# Altium PCB Esark Sign PCB.PcbDoc
Units mil, origin at the board's own origin, x right, y up, seen from the top; angles counter-clockwise.
Board outline 6000 x 4000 mil, 2 copper layers (Top Layer, Bottom Layer); 149 components, 5 nets, 300 pads, 0 vias.
Unrouted connection lines stored in the file: 127.
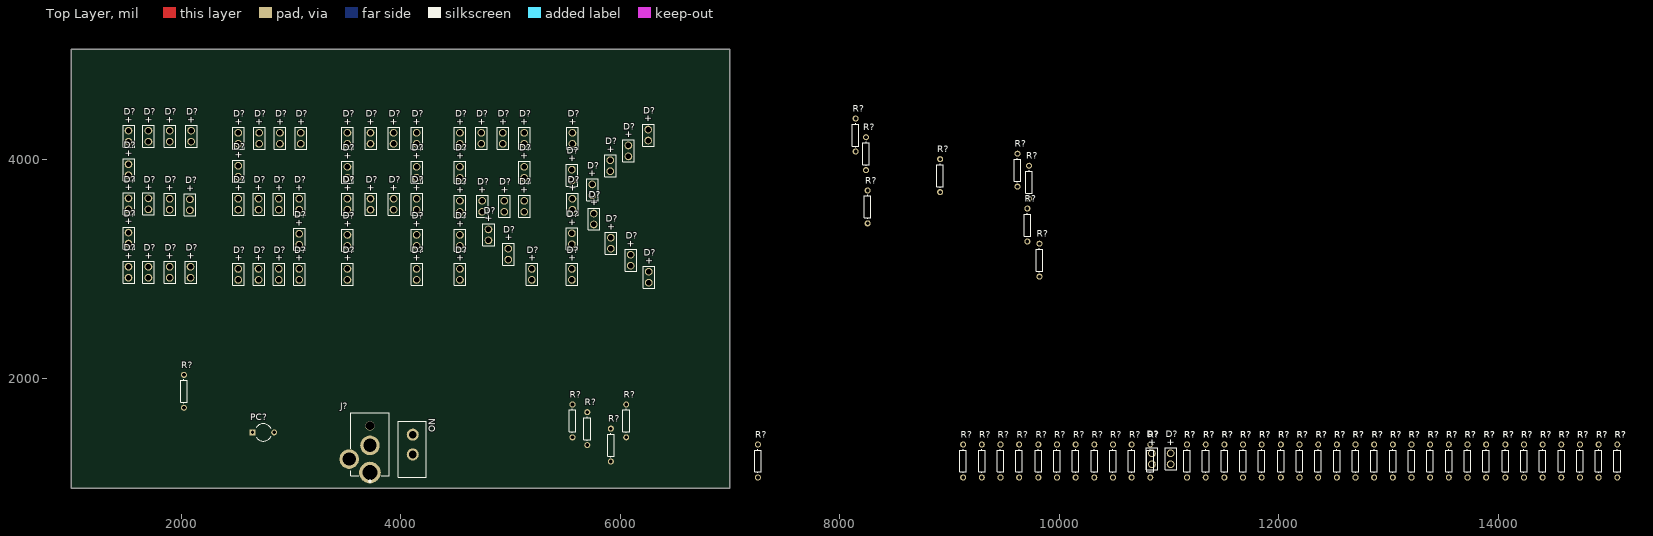
[diagram p0: Top Layer view]
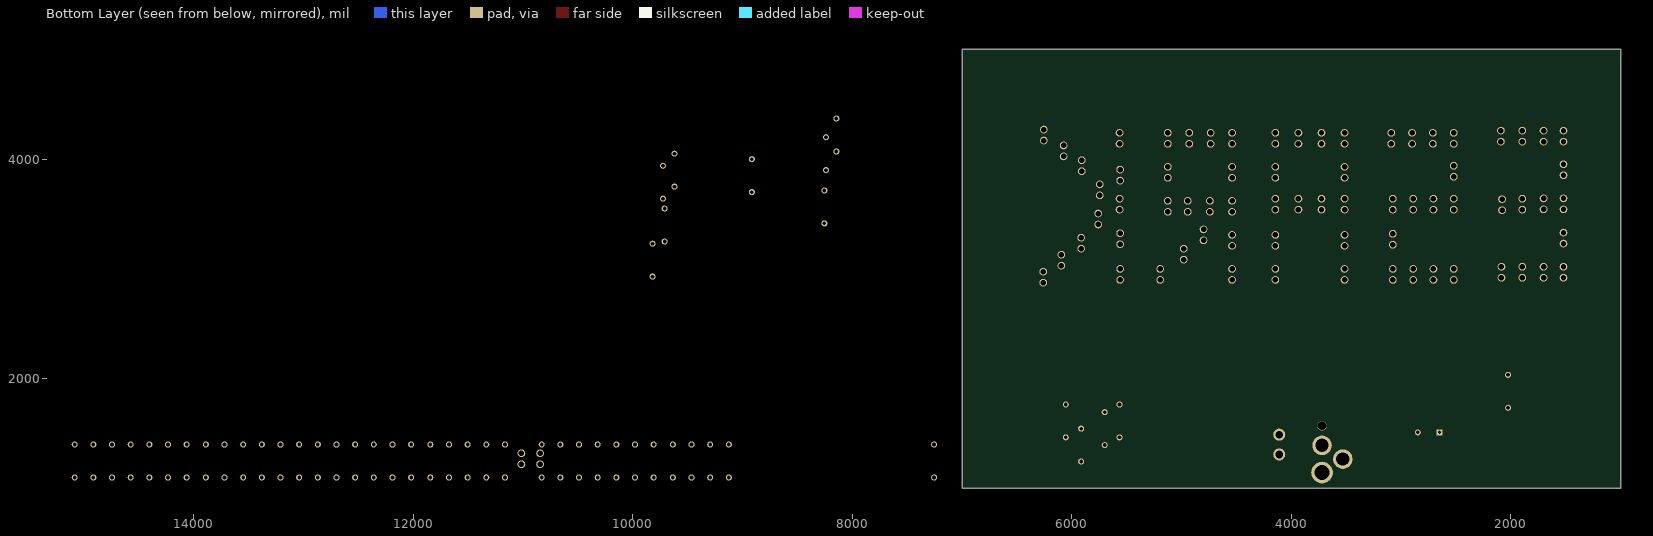
[diagram p1: Bottom Layer view, seen from below]

## Layer stack, top to bottom
Top Solder: solder mask 0.4, Solder Resist, Dk 3.5
Top Layer: signal copper 1.4
Dielectric 1: dielectric 12.6, FR-4, Dk 4.8
Bottom Layer: signal copper 1.4
Bottom Solder: solder mask 0.4, Solder Resist, Dk 3.5

## Board outline
1000,1000 7000,1000 7000,5000 1000,5000

## Design rules (kind name [scope] priority, off if disabled: settings)
Clearance [All] p1: gap=10 ignorepadtopadclearanceinfootprint=FALSE except(0: Arc-Hole Track-Hole SMDPad-Hole THPad-Hole Via-Hole Fill-Hole Poly-Hole Region-Hole Text-Hole)
PolygonConnect [All] p1: connectstyle=Relief reliefconductorwidth=10 reliefentries=4 polygonreliefangle="90 Angle" airgapwidth=10
RoomDefinition "Esark Sign Schematic" [InComponentClass('Esark Sign Schematic')] p1: confinementstyle=ConfineIn formatcopy=TRUE lockcomponents=FALSE outline 7045,1055 11915,1055 11915,1820 7045,1820
RoutingVias [All] p1: holewidth=28 width=50 viastyle="Through Hole" minholewidth=28 minwidth=50 maxholewidth=28 maxwidth=50
SolderMaskExpansion [All] p1: expansion=4 istentingtop=FALSE
Width [All] p1: maxlimit=10 minlimit=10 preferedwidth=10
30 further rules are at their usual default settings.

## Classes and differential pairs
component class "Esark Sign Schematic": D? J? PC? R?

## Components (designator, comment, footprint, x,y, rotation, side; value= is the part's Value field where it differs from the comment)
D? "LED0" LED-0 6255,4220 r90 top
D? "LED0" LED-0 6095,3080 r90 top
D? "LED0" LED-0 4741.67,3570 r90 top
D? "LED0" LED-0 5125,3570 r90 top
D? "LED0" LED-0 5560,3855 r90 top
D? "LED0" LED-0 4800,3310 r90 top
D? "LED0" LED-0 11015,1270 r90 top
D? "LED0" LED-0 4930,4190 r90 top
D? "LED0" LED-0 6075,4075 r90 top
D? "LED0" LED-0 5565,3590 r90 top
D? "LED0" LED-0 5910,3940 r90 top
D? "LED0" LED-0 4735,4190 r90 top
D? "LED0" LED-0 5565,4190 r90 top
D? "LED0" LED-0 5560,3275 r90 top
D? "LED0" LED-0 5125,4190 r90 top
D? "LED0" LED-0 5915,3235 r90 top
D? "LED0" LED-0 4980,3135 r90 top
D? "LED0" LED-0 5125,3880 r90 top
D? "LED0" LED-0 5560,2950 r90 top
D? "LED0" LED-0 4943.33,3570 r90 top
D? "LED0" LED-0 4540,2950 r90 top
D? "LED0" LED-0 5760,3455 r90 top
D? "LED0" LED-0 5195,2950 r90 top
D? "LED0" LED-0 5745,3720 r90 top
D? "LED0" LED-0 10845,1270 r90 top
D? "LED0" LED-0 3075,3590 r90 top
D? "LED0" LED-0 2520,2950 r90 top
D? "LED0" LED-0 4540,3260 r90 top
D? "LED0" LED-0 4145,2950 r90 top
D? "LED0" LED-0 4540,3570 r90 top
D? "LED0" LED-0 4145,3260 r90 top
D? "LED0" LED-0 3725,4190 r90 top
D? "LED0" LED-0 4145,3590 r90 top
D? "LED0" LED-0 3515,4190 r90 top
D? "LED0" LED-0 3515,3590 r90 top
D? "LED0" LED-0 2705,2950 r90 top
D? "LED0" LED-0 3075,2950 r90 top
D? "LED0" LED-0 3515,3260 r90 top
D? "LED0" LED-0 2890,2950 r90 top
D? "LED0" LED-0 3935,4190 r90 top
D? "LED0" LED-0 4540,3880 r90 top
D? "LED0" LED-0 4540,4190 r90 top
D? "LED0" LED-0 3515,2950 r90 top
D? "LED0" LED-0 4145,4190 r90 top
D? "LED0" LED-0 4145,3880 r90 top
D? "LED0" LED-0 3725,3590 r90 top
D? "LED0" LED-0 3515,3590 r90 top
D? "LED0" LED-0 3935,3590 r90 top
D? "LED0" LED-0 3075,3270 r90 top
D? "LED0" LED-0 2520,4190 r90 top
D? "LED0" LED-0 2900,4190 r90 top
D? "LED0" LED-0 6260,2925 r90 top
D? "LED0" LED-0 2520,3590 r90 top
D? "LED0" LED-0 2090,4210 r90 top
D? "LED0" LED-0 2710,4190 r90 top
D? "LED0" LED-0 2705,3590 r90 top
D? "LED0" LED-0 1701.67,4210 r90 top
D? "LED0" LED-0 2890,3590 r90 top
D? "LED0" LED-0 2520,3890 r90 top
D? "LED0" LED-0 1895,4210 r90 top
D? "LED0" LED-0 3090,4190 r90 top
D? "LED0" LED-0 2080,3585 r90 top
D? "LED0" LED-0 1520,4210 r90 top
D? "LED0" LED-0 1701.67,3592.5 r90 top
D? "LED0" LED-0 1895,3590 r90 top
D? "LED0" LED-0 1701.67,2970 r90 top
D? "LED0" LED-0 1520,3592.5 r90 top
D? "LED0" LED-0 1520,3903.75 r90 top
D? "LED0" LED-0 1520,3281.25 r90 top
D? "LED0" LED-0 2085,2970 r90 top
D? "LED0" LED-0 3515,3880 r90 top
D? "LED0" LED-0 1895,2970 r90 top
D? "LED0" LED-0 1520,2970 r90 top
J? "PJ-057BH" CUI_PJ-057BH 3720,1144.8 r90 top
PC? "33u" CAPR5-4X5 2748.43,1510 r0 top
R? "Res1" AXIAL-0.3 7255,1250 r90 top value=200
R? "Res1" AXIAL-0.3 12530,1250 r90 top value=200
R? "Res1" AXIAL-0.3 14915,1250 r90 top value=200
R? "Res1" AXIAL-0.3 14745,1250 r90 top value=200
R? "Res1" AXIAL-0.3 12700,1250 r90 top value=200
R? "Res1" AXIAL-0.3 11335,1250 r90 top value=200
R? "Res1" AXIAL-0.3 13890,1250 r90 top value=200
R? "Res1" AXIAL-0.3 11505,1250 r90 top value=200
R? "Res1" AXIAL-0.3 11845,1250 r90 top value=200
R? "Res1" AXIAL-0.3 13210,1250 r90 top value=200
R? "Res1" AXIAL-0.3 15085,1250 r90 top value=200
R? "Res1" AXIAL-0.3 14235,1250 r90 top value=200
R? "Res1" AXIAL-0.3 13040,1250 r90 top value=200
R? "Res1" AXIAL-0.3 13380,1250 r90 top value=200
R? "Res1" AXIAL-0.3 12190,1250 r90 top value=200
R? "Res1" AXIAL-0.3 13550,1250 r90 top value=200
R? "Res1" AXIAL-0.3 14405,1250 r90 top value=200
R? "Res1" AXIAL-0.3 11675,1250 r90 top value=200
R? "Res1" AXIAL-0.3 12020,1250 r90 top value=200
R? "Res1" AXIAL-0.3 14575,1250 r90 top value=200
R? "Res1" AXIAL-0.3 13720,1250 r90 top value=200
R? "Res1" AXIAL-0.3 14065,1250 r90 top value=200
R? "Res1" AXIAL-0.3 12360,1250 r90 top value=200
R? "Res1" AXIAL-0.3 11165,1250 r90 top value=200
R? "Res1" AXIAL-0.3 12870,1250 r90 top value=200
R? "Res1" AXIAL-0.3 13380,1250 r90 top value=200
R? "Res1" AXIAL-0.3 11845,1250 r90 top value=200
R? "Res1" AXIAL-0.3 11335,1250 r90 top value=200
R? "Res1" AXIAL-0.3 14745,1250 r90 top value=200
R? "Res1" AXIAL-0.3 13720,1250 r90 top value=200
R? "Res1" AXIAL-0.3 15085,1250 r90 top value=200
R? "Res1" AXIAL-0.3 11165,1250 r90 top value=200
R? "Res1" AXIAL-0.3 12700,1250 r90 top value=200
R? "Res1" AXIAL-0.3 12530,1250 r90 top value=200
R? "Res1" AXIAL-0.3 14575,1250 r90 top value=200
R? "Res1" AXIAL-0.3 13210,1250 r90 top value=200
R? "Res1" AXIAL-0.3 13890,1250 r90 top value=200
R? "Res1" AXIAL-0.3 14065,1250 r90 top value=200
R? "Res1" AXIAL-0.3 11675,1250 r90 top value=200
R? "Res1" AXIAL-0.3 14405,1250 r90 top value=200
R? "Res1" AXIAL-0.3 14915,1250 r90 top value=200
R? "Res1" AXIAL-0.3 12360,1250 r90 top value=200
R? "Res1" AXIAL-0.3 12870,1250 r90 top value=200
R? "Res1" AXIAL-0.3 13040,1250 r90 top value=200
R? "Res1" AXIAL-0.3 12190,1250 r90 top value=200
R? "Res1" AXIAL-0.3 11505,1250 r90 top value=200
R? "Res1" AXIAL-0.3 14235,1250 r90 top value=200
R? "Res1" AXIAL-0.3 12020,1250 r90 top value=200
R? "Res1" AXIAL-0.3 13550,1250 r90 top value=200
R? "Res1" AXIAL-0.3 10660,1250 r90 top value=200
R? "Res1" AXIAL-0.3 10830,1250 r90 top value=200
R? "Res1" AXIAL-0.3 9980,1250 r90 top value=200
R? "Res1" AXIAL-0.3 8915,3850 r90 top value=200
R? "Res1" AXIAL-0.3 9125,1250 r90 top value=200
R? "Res1" AXIAL-0.3 9465,1250 r90 top value=200
R? "Res1" AXIAL-0.3 10320,1250 r90 top value=200
R? "Res1" AXIAL-0.3 9810,1250 r90 top value=200
R? "Res1" AXIAL-0.3 10150,1250 r90 top value=200
R? "Res1" AXIAL-0.3 9635,1250 r90 top value=200
R? "Res1" AXIAL-0.3 10490,1250 r90 top value=200
R? "Res1" AXIAL-0.3 9295,1250 r90 top value=200
R? "Res1" AXIAL-0.3 8145,4220 r90 top value=200
R? "Res1" AXIAL-0.3 5915,1395 r90 top value=200
R? "Res1" AXIAL-0.3 5565,1615 r90 top value=200
R? "Res1" AXIAL-0.3 9620,3900 r90 top value=200
R? "Res1" AXIAL-0.3 8240,4050 r90 top value=200
R? "Res1" AXIAL-0.3 8255,3565 r90 top value=200
R? "Res1" AXIAL-0.3 2025,1885 r90 top value=200
R? "Res1" AXIAL-0.3 6055,1615 r90 top value=200
R? "Res1" AXIAL-0.3 9725,3790 r90 top value=200
R? "Res1" AXIAL-0.3 9710,3400 r90 top value=200
R? "Res1" AXIAL-0.3 5700,1545 r90 top value=200
R? "Res1" AXIAL-0.3 9820,3080 r90 top value=200
? "SPST Switch" "SPST Switch" 4110,1310 r90 top

## Footprints (in the part's own frame and the unit in brackets; to place one, negate y for a bottom-side part, rotate by r counter-clockwise, add the part's x,y. Pads: shape width x height; smd on the part's side, far side on the other; paste and mask are expansions set on the pad)
AXIAL-0.3 [mm] "Axial Device, Thru-Hole; 2 Leads; 0.3 in Pin Spacing"
  round 1.4 hole 0.85: 1(-3.81,0) 2(3.81,0)
  silkscreen extent -2.77,-0.76 2.77,0.76
CAPR5-4X5 [mm] "Capacitor; 2 Leads"
  rect 1.35x1.35 hole 0.8: 1(-2.5,0)
  round 1.35 hole 0.8: 2(2.5,0)
  silkscreen extent -1.69,-2 1.82,2
CUI_PJ-057BH [mil]
  round 197 hole 140: 1(0,0)
  round 178 hole 120: 2(248.03,0) 3(122.05,188.98)
  round 84 hole 78.74 unplated: ""(425.2,0)
  silkscreen extent -87,-177 543,177
LED-0 [mil] "LED; 2 Leads"
  round 70 hole 50: 1(50,0) 2(-50,0)
  silkscreen extent -100,-55 100,50
"SPST Switch" [mil] "SW"
  round 110 hole 70: 1(0,0) 2(180,0)
  silkscreen extent -210,-125 300,130

## Part data
D? D? D? D? D? D? D? D? D? D? D? D? D? D? D? D? D? D? D? D? D? D? D? D? D? D? D? D? D? D? D? D? D? D? D? D? D? D? D? D? D? D? D? D? D? D? D? D? D? D? D? D? D? D? D? D? D? D? D? D? D? D? D? D? D? D? D? D? D? D? D? D? D?: "Typical INFRARED GaAs LED", LatestRevisionDate=08-Jul-2005, LatestRevisionNote="Mech Layer 1 removed.", PackageDescription="LED; 2 Leads", PackageReference=LED-0, Published=8-Jun-2000, Publisher="Altium Limited"
J?: "2.5 x 6.3 mm, 5.0 A, Horizontal, Through Hole, Pick-n-Place Top, Dc Power Jack Connector", Package=None, Availability=Unavailable, MF="CUI Devices", MP=PJ-057BH, Price=None, SnapEDA_Link=https://www.snapeda.com/parts/PJ-057BH/CUI%20Devices/view-part/590963/?ref=snap
PC?: library part Cap2, "Capacitor", PackageDescription="Capacitor; 2 Leads", PackageReference=CAPR5-4X5, Published=23-Sep-2002, Publisher="Altium Limited"
R? R? R? R? R? R? R? R? R? R? R? R? R? R? R? R? R? R? R? R? R? R? R? R? R? R? R? R? R? R? R? R? R? R? R? R? R? R? R? R? R? R? R? R? R? R? R? R? R? R? R? R? R? R? R? R? R? R? R? R? R? R? R? R? R? R? R? R? R? R? R? R? R?: "Resistor", LatestRevisionDate=17-Jul-2002, LatestRevisionNote="Re-released for DXP Platform.", PackageDescription="Axial Device, Thru-Hole; 2 Leads; 0.3 in Pin Spacing", PackageReference=AXIAL-0.3, Published=8-Jun-2000, Publisher="Altium Limited"

## Nets (pads, with @x,y where several pads share a name; then routed paths per layer and width w, separated by ;. In a path a pad name is that pad's centre, name@x,y a point inside that pad or via, vN(x,y) a via of type N, cw(c..) or ccw(c..) an arc to the next point about the centre after c; other vN are vias at no path point)
3V3_IN: ?.2 J?.1 PC?.1
5V: ?.1 R?.2
GND: D?.2 J?.2 J?.3 PC?.2
LED1: D?.1@1520,4260 R?.1@8145,4070
NetD?_1: D?.1@4145,3930 R?.1@13550,1100
pads on no net: D?.1@1520,3020 D?.1@1520,3331.25 D?.1@1520,3642.5 D?.1@1520,3953.75 D?.1@1701.67,3020 D?.1@1701.67,3642.5 D?.1@1701.67,4260 D?.1@1895,3020 D?.1@1895,3640 D?.1@1895,4260 D?.1@2080,3635 D?.1@2085,3020 D?.1@2090,4260 D?.1@2520,3000 D?.1@2520,3640 D?.1@2520,3940 D?.1@2520,4240 D?.1@2705,3000 D?.1@2705,3640 D?.1@2710,4240 D?.1@2890,3000 D?.1@2890,3640 D?.1@2900,4240 D?.1@3075,3000 D?.1@3075,3320 D?.1@3075,3640 D?.1@3090,4240 D?.1@3515,3000 D?.1@3515,3310 D?.1@3515,3640 D?.1@3515,3930 D?.1@3515,4240 D?.1@3725,3640 D?.1@3725,4240 D?.1@3935,3640 D?.1@3935,4240 D?.1@4145,3000 D?.1@4145,3310 D?.1@4145,3640 D?.1@4145,4240 D?.1@4540,3000 D?.1@4540,3310 D?.1@4540,3620 D?.1@4540,3930 D?.1@4540,4240 D?.1@4735,4240 D?.1@4741.67,3620 D?.1@4800,3360 D?.1@4930,4240 D?.1@4943.33,3620 D?.1@4980,3185 D?.1@5125,3620 D?.1@5125,3930 D?.1@5125,4240 D?.1@5195,3000 D?.1@5560,3000 D?.1@5560,3325 D?.1@5560,3905 D?.1@5565,3640 D?.1@5565,4240 D?.1@5745,3770 D?.1@5760,3505 D?.1@5910,3990 D?.1@5915,3285 D?.1@6075,4125 D?.1@6095,3130 D?.1@6255,4270 D?.1@6260,2975 D?.1@10845,1320 D?.1@11015,1320 J?. R?.1@2025,1735 R?.1@5565,1465 R?.1@5700,1395 R?.1@5915,1245 R?.1@6055,1465 R?.1@7255,1100 R?.1@8240,3900 R?.1@8255,3415 R?.1@8915,3700 R?.1@9125,1100 R?.1@9295,1100 R?.1@9465,1100 R?.1@9620,3750 R?.1@9635,1100 R?.1@9710,3250 R?.1@9725,3640 R?.1@9810,1100 R?.1@9820,2930 R?.1@9980,1100 R?.1@10150,1100 R?.1@10320,1100 R?.1@10490,1100 R?.1@10660,1100 R?.1@10830,1100 R?.1@11165,1100 R?.1@11335,1100 R?.1@11505,1100 R?.1@11675,1100 R?.1@11845,1100 R?.1@12020,1100 R?.1@12190,1100 R?.1@12360,1100 R?.1@12530,1100 R?.1@12700,1100 R?.1@12870,1100 R?.1@13040,1100 R?.1@13210,1100 R?.1@13380,1100 R?.1@13550,1100 R?.1@13720,1100 R?.1@13890,1100 R?.1@14065,1100 R?.1@14235,1100 R?.1@14405,1100 R?.1@14575,1100 R?.1@14745,1100 R?.1@14915,1100 R?.1@15085,1100

## Text inside footprints (layer, text, board x,y; h text height)
D?: Top Overlay "+" at 6285,4335 h60 r90
D?: Top Overlay "+" at 11045,1385 h60 r90
D?: Top Overlay "+" at 10875,1385 h60 r90
D?: Top Overlay "+" at 6125,3195 h60 r90
D?: Top Overlay "+" at 5945,3350 h60 r90
D?: Top Overlay "+" at 5790,3570 h60 r90
D?: Top Overlay "+" at 6105,4190 h60 r90
D?: Top Overlay "+" at 5940,4055 h60 r90
D?: Top Overlay "+" at 5775,3835 h60 r90
D?: Top Overlay "+" at 5590,3065 h60 r90
D?: Top Overlay "+" at 5590,3390 h60 r90
D?: Top Overlay "+" at 5595,3705 h60 r90
D?: Top Overlay "+" at 5590,3970 h60 r90
D?: Top Overlay "+" at 5595,4305 h60 r90
D?: Top Overlay "+" at 5225,3065 h60 r90
D?: Top Overlay "+" at 5010,3250 h60 r90
D?: Top Overlay "+" at 4830,3425 h60 r90
D?: Top Overlay "+" at 4771.66,3685 h60 r90
D?: Top Overlay "+" at 4973.33,3685 h60 r90
D?: Top Overlay "+" at 5155,3685 h60 r90
D?: Top Overlay "+" at 5155,3995 h60 r90
D?: Top Overlay "+" at 5155,4305 h60 r90
D?: Top Overlay "+" at 4960,4305 h60 r90
D?: Top Overlay "+" at 4765,4305 h60 r90
D?: Top Overlay "+" at 4570,3065 h60 r90
D?: Top Overlay "+" at 4570,3375 h60 r90
D?: Top Overlay "+" at 4570,3685 h60 r90
D?: Top Overlay "+" at 4570,3995 h60 r90
D?: Top Overlay "+" at 4570,4305 h60 r90
D?: Top Overlay "+" at 3965,3705 h60 r90
D?: Top Overlay "+" at 3755,3705 h60 r90
D?: Top Overlay "+" at 4175,3065 h60 r90
D?: Top Overlay "+" at 4175,3375 h60 r90
D?: Top Overlay "+" at 4175,3705 h60 r90
D?: Top Overlay "+" at 4175,3995 h60 r90
D?: Top Overlay "+" at 4175,4305 h60 r90
D?: Top Overlay "+" at 3965,4305 h60 r90
D?: Top Overlay "+" at 3755,4305 h60 r90
D?: Top Overlay "+" at 3545,4305 h60 r90
D?: Top Overlay "+" at 3545,3705 h60 r90
D?: Top Overlay "+" at 3545,3705 h60 r90
D?: Top Overlay "+" at 3545,3375 h60 r90
D?: Top Overlay "+" at 3545,3065 h60 r90
D?: Top Overlay "+" at 2550,3065 h60 r90
D?: Top Overlay "+" at 2735,3065 h60 r90
D?: Top Overlay "+" at 2920,3065 h60 r90
D?: Top Overlay "+" at 3105,3065 h60 r90
D?: Top Overlay "+" at 3105,3385 h60 r90
D?: Top Overlay "+" at 3105,3705 h60 r90
D?: Top Overlay "+" at 2920,3705 h60 r90
D?: Top Overlay "+" at 2735,3705 h60 r90
D?: Top Overlay "+" at 2550,3705 h60 r90
D?: Top Overlay "+" at 2550,4005 h60 r90
D?: Top Overlay "+" at 3120,4305 h60 r90
D?: Top Overlay "+" at 2740,4305 h60 r90
D?: Top Overlay "+" at 2930,4305 h60 r90
D?: Top Overlay "+" at 2550,4305 h60 r90
D?: Top Overlay "+" at 6290,3040 h60 r90
D?: Top Overlay "+" at 2120,4325 h60 r90
D?: Top Overlay "+" at 1925,4325 h60 r90
D?: Top Overlay "+" at 1731.66,4325 h60 r90
D?: Top Overlay "+" at 1550,3085 h60 r90
D?: Top Overlay "+" at 1731.66,3085 h60 r90
D?: Top Overlay "+" at 1925,3085 h60 r90
D?: Top Overlay "+" at 2115,3085 h60 r90
D?: Top Overlay "+" at 3545,3995 h60 r90
D?: Top Overlay "+" at 1731.66,3707.5 h60 r90
D?: Top Overlay "+" at 1925,3705 h60 r90
D?: Top Overlay "+" at 2110,3700 h60 r90
D?: Top Overlay "+" at 1550,3396.25 h60 r90
D?: Top Overlay "+" at 1550,3707.5 h60 r90
D?: Top Overlay "+" at 1550,4018.75 h60 r90
D?: Top Overlay "+" at 1550,4325 h60 r90
?: Top Overlay "ON" at 4315,1510 h60 r90